# Altium PCB Car_dirver.PcbDoc
Units mil, origin at the board's own origin, x right, y up, seen from the top; angles counter-clockwise.
Board outline 4080 x 5775 mil, 2 copper layers (Top Layer, Bottom Layer); 41 components, 38 nets, 158 pads, 4 vias.
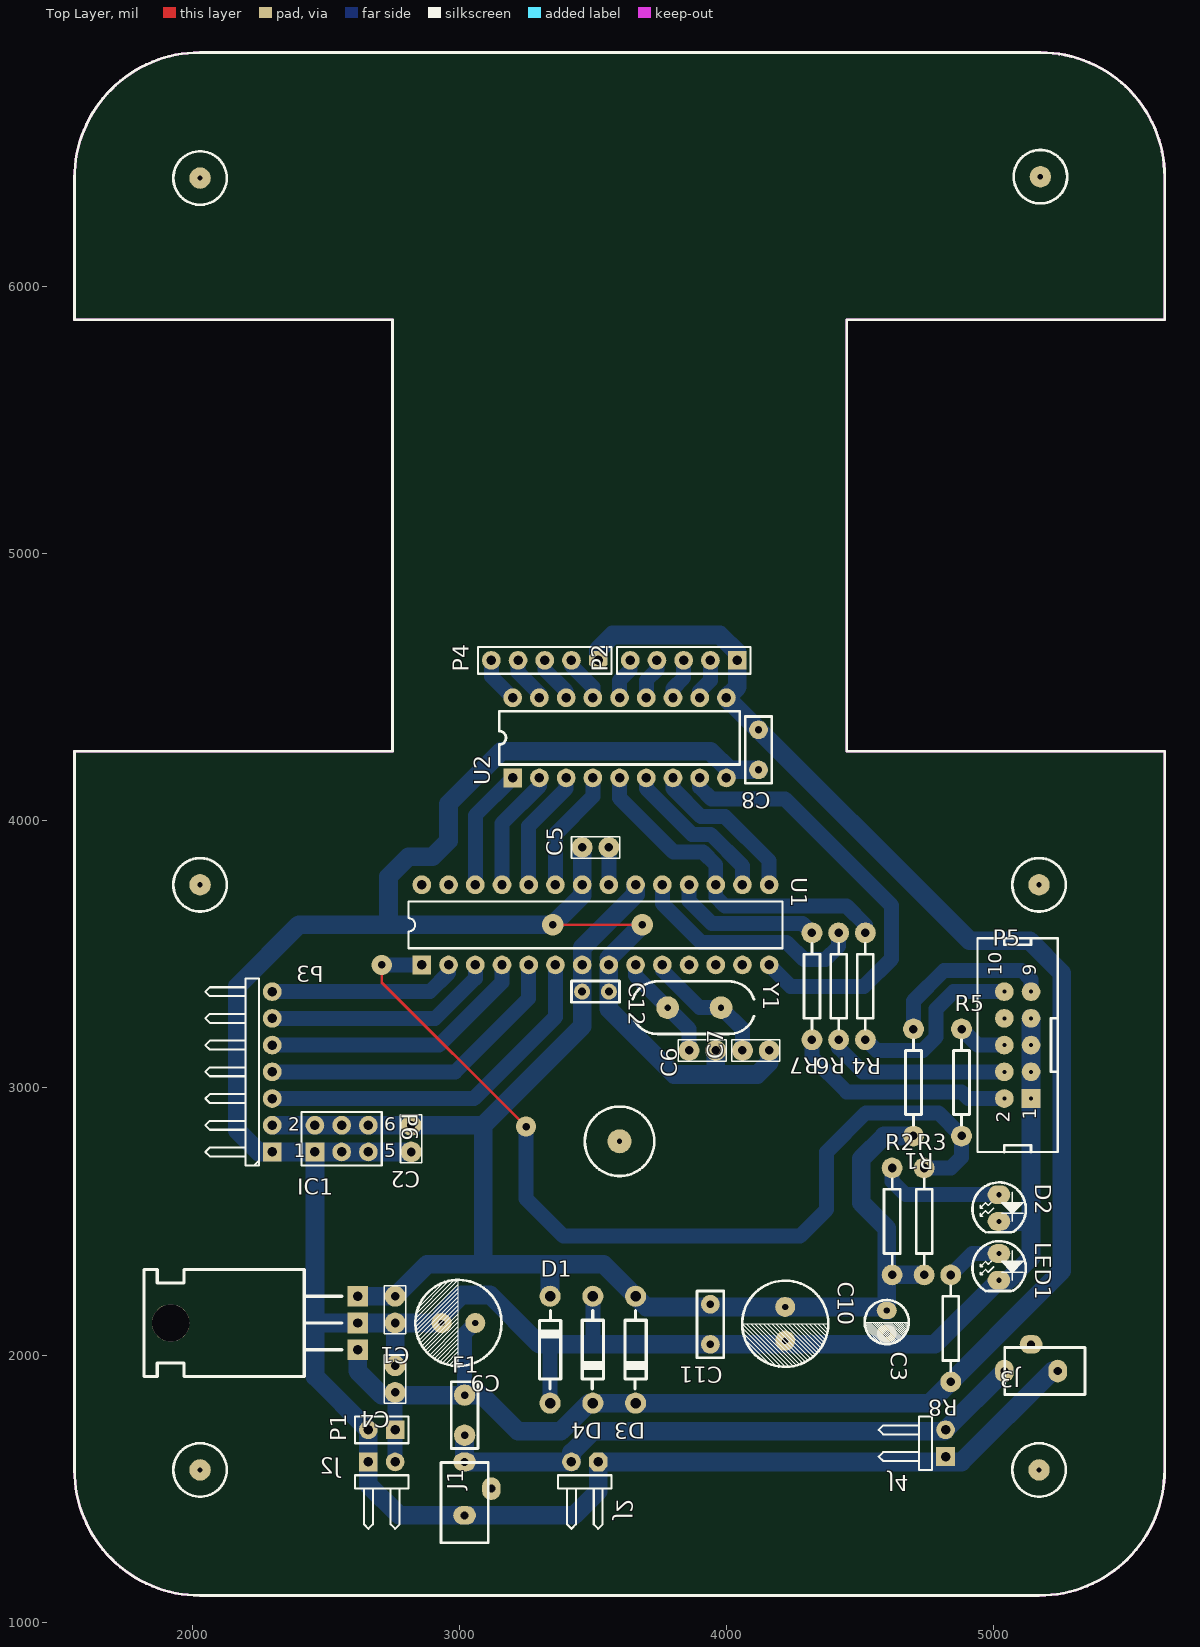
[diagram p0: Top Layer view]
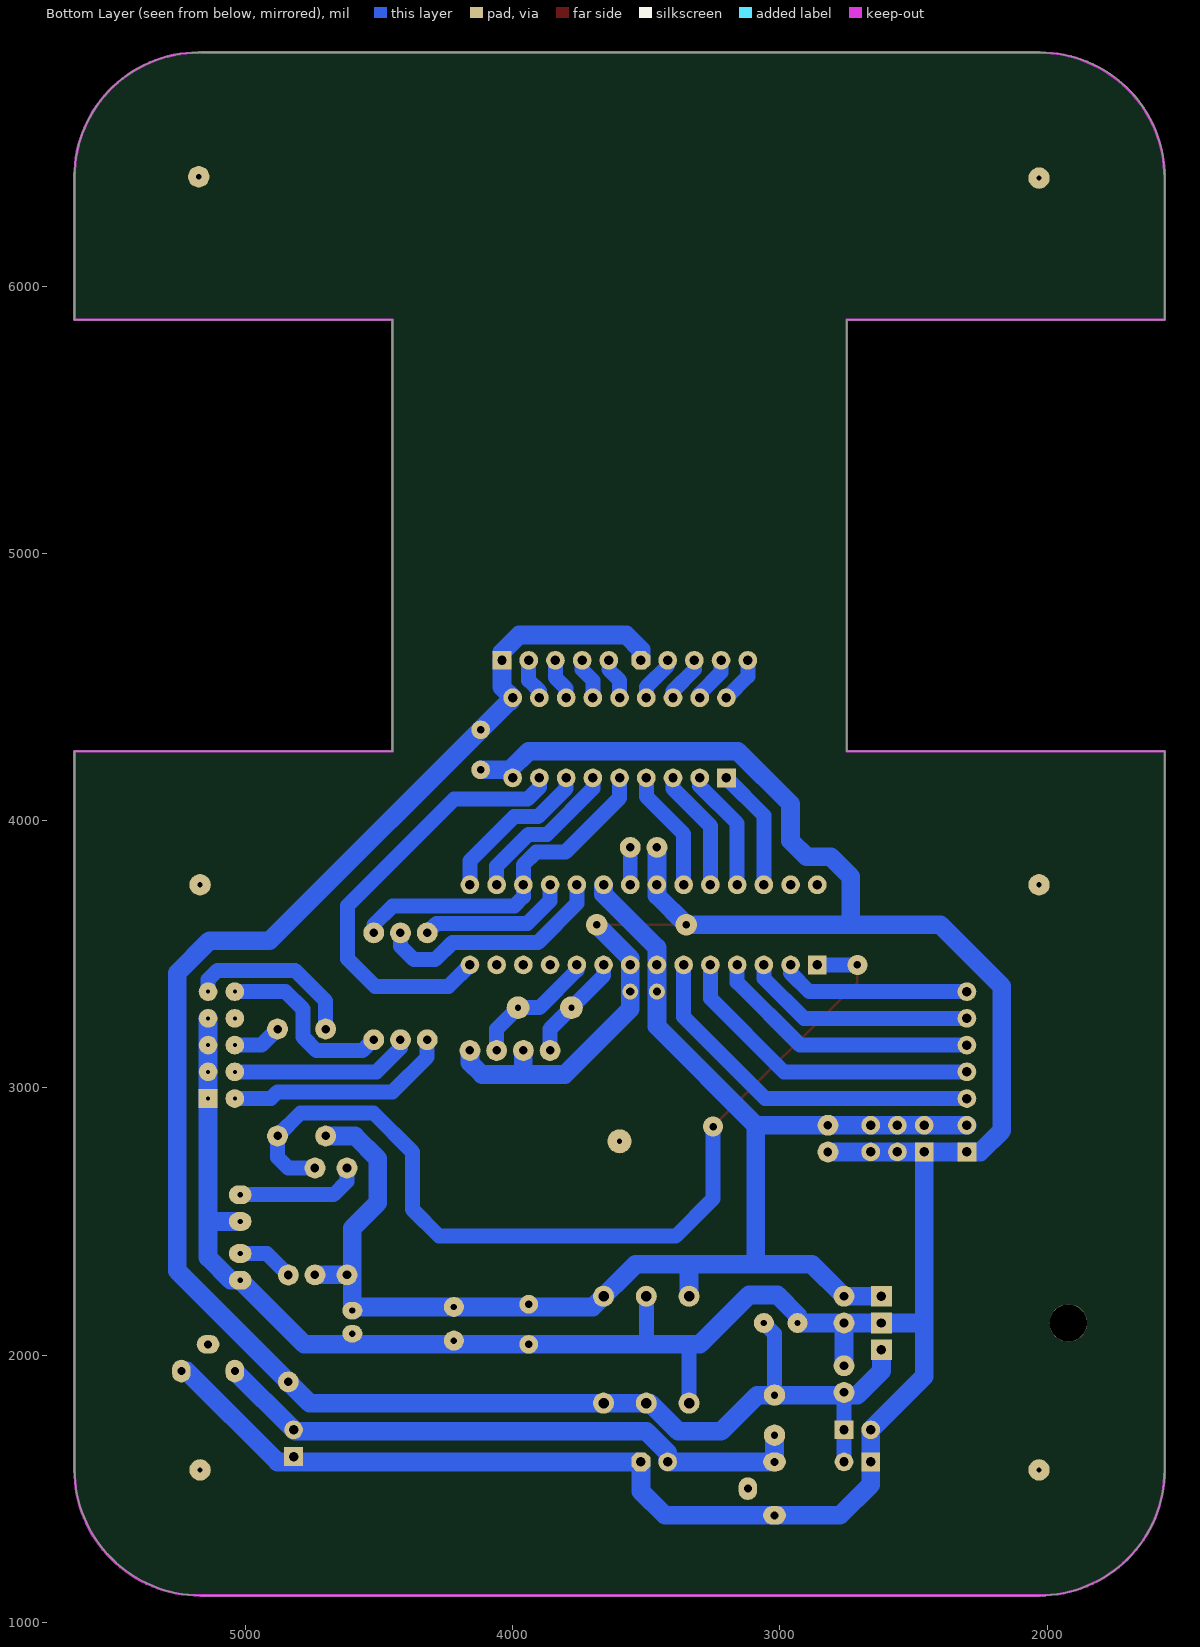
[diagram p1: Bottom Layer view, seen from below]

## Layer stack, top to bottom
Top Layer: signal copper 1.4
Dielectric: dielectric 12.6, FR-4, Dk 4.8
Bottom Layer: signal copper 1.4

## Board outline
2005,1100 5165,1100 ccw(c5165,1575) 5640,1575 5640,4260 4450,4260 4450,5875 5640,5875 5640,6410 ccw(c5175,6410) 5175,6875 2025,6875 ccw(c2025,6410) 1560,6410 1560,5875 2750,5875 2750,4260 1560,4260 1560,1570 ccw(c2030,1570) 2030,1100

## Design rules (kind name [scope] priority, off if disabled: settings)
Clearance [All] p1: gap=10
ComponentClearance [All] p1: gap=10 collisioncheckmode=3 verticalgap=10
PolygonConnect [All] p1: connectstyle=Relief reliefconductorwidth=10 reliefentries=4 polygonreliefangle="90 Angle"
RoutingVias [All] p1: holewidth=28 width=50 viastyle="Through Hole" minholewidth=28 minwidth=50 maxholewidth=28 maxwidth=50
SolderMaskExpansion [All] p1: expansion=4
TestPointUsage [All] p1: valid=0 allowmultiple=FALSE
Testpoint [All] p1: side=15 testpointundercomponent=TRUE minsize=40 maxsize=100 preferedsize=60 minholesize=0 maxholesize=40 preferedholesize=32 testpointgrid=1 style=1023 order=0-112345678
Width [All] p1: maxlimit=85 minlimit=10 preferedwidth=10 toplayer_maxwidth=10 bottomlayer_prefwidth=56 minimp=50.000000 maximp=50.000000 favimp=50.000000
17 further rules are at their usual default settings.

## Classes and differential pairs
component class Car_Driver: C1 C2 C3 C4 C5 C6 C7 C8 C9 C10 C11 C12 D1 D2 D3 D4 F1 IC1 J1 J2 LED1 P1 P2 P3 P4 P5 P6 R1 R2 R3 R4 R5 R6 R7 R8 U1 U2 Y1

## Components (designator, comment, footprint, x,y, rotation, side; value= is the part's Value field where it differs from the comment)
C1 "104" CB1 2760,2220 r270 top
C2 "102" CB1 2820,2860 r270 top
C3 "10uf" 10U16 4600,2166.61 r270 top
C4 "104" CB1 2760,1960 r270 top
C5 "104" CB1 3560,3900 r180 top
C6 "20" CB1 3960,3140 r180 top
C7 "20" CB1 4160,3140 r180 top
C8 "104" cap_104 4120,4340 r270 top
C9 "1000uf" 470U25 3060,2120 r180 top
C10 "100uf" 470U25 4220,2180 r270 top
C11 "104" cap_104 3940,2190 r270 top
C12 "102" C0.1/0.2 3460,3360 r0 top
D1 "5V1" DIODE 3340,1820 r90 top
D2 "LED" LED_5 5020,2600 r270 top
D3 "Diode 1N4001" diode 3660,2220 r270 top
D4 "IN4148" DIODE 3500,2220 r270 top
F1 "FUSE" CAP_104 3020,1700 r90 top
IC1 "7805_1" to-220 2620,2020 r90 top
J1 "PWR2.5" DC3 3020,1400 r180 top
J2 "2PIN-1" HDR1X2H#1 2660,1600 r0 top
J2 "2PIN-1" HDR1X2H#2 3520,1600 r180 top
J3 "PWR2.5" DC3 5240,1940 r270 top (schematic designator J1)
J4 "2PIN-1" HDR1X2H#1 4820,1620 r90 top (schematic designator J2)
LED1 "*" LED_5 5020,2380 r270 top
P1 "Header 2" HDR1X2 2760,1720 r180 top
P2 "Header 5" HDR1X5#1 4040,4600 r180 top
P3 "Header 7" HDR1X7H 2300,2760 r90 top
P4 "Header 5" HDR1X5#2 3520,4600 r180 top
P5 "AVRISP" ISP 5140,2960 r90 top
P6 "Header 3X2" HDR2X3 2460,2760 r0 top
R1 "20" AXIAL0.4 4700,3220 r270 top
R2 "1k" AXIAL0.4 4620,2300 r90 top
R3 "100" AXIAL0.4 4740,2300 r90 top
R4 "100" AXIAL0.4 4520,3580 r270 top
R5 "100" AXIAL0.4 4880,2820 r90 top
R6 "100" AXIAL0.4 4420,3580 r270 top
R7 "100" AXIAL0.4 4320,3580 r270 top
R8 "1k" AXIAL0.4 4839.6,2299.6 r270 top
U1 "ATMEGA8_DIP28" 28P3 3510,3610 r0 top
U2 "ULN2803AG" DIP18 3200,4160 r90 top
Y1 "7.372" XTAL_US 3780,3300 r0 top

## Footprints (in the part's own frame and the unit in brackets; to place one, negate y for a bottom-side part, rotate by r counter-clockwise, add the part's x,y. Pads: shape width x height; smd on the part's side, far side on the other; paste and mask are expansions set on the pad)
10U16 [mm]
  oval 1.651x1.905 hole 0.6: 1(0,0) 2(2.2,0)
  silkscreen extent -1,-2.1 3.2,2.1
28P3 [mil] "DIP; 28 Leads; Row Spacing 7.62 mm; Pitch 2.54 mm"
  rect 70x70 hole 35.43 unplated: 1(-650,-150)
  round 70 hole 35.43 unplated: 2(-550,-150) 3(-450,-150) 4(-350,-150) 5(-250,-150) 6(-150,-150) 7(-50,-150) 8(50,-150) 9(150,-150) 10(250,-150) 11(350,-150) 12(450,-150) 13(550,-150) 14(650,-150) 15(650,150) 16(550,150) 17(450,150) 18(350,150) 19(250,150) 20(150,150) 21(50,150) 22(-50,150) 23(-150,150) 24(-250,150) 25(-350,150) 26(-450,150) 27(-550,150) 28(-650,150)
  silkscreen extent -700,-88 700,88
470U25 [mm]
  round 1.905 hole 0.6: 1(0,0) 2(3.2,0)
  silkscreen extent -2.5,-4.1 5.7,4.1
AXIAL0.4 [mil]
  round 78 hole 32 paste+0 mask+4: 1(0,0) 2(400,0)
  silkscreen extent 40,-30 360,30
C0.1/0.2 [mil]
  round 60 hole 30: 1(0,0) 2(100,0)
  silkscreen extent -40,-40 140,40
cap_104 [mil]
  round 70 hole 27.56: 1(0,0) 2(150,0)
  silkscreen extent -50,-50 200,50
CAP_104 [mil]
  round 80 hole 27.56: 1(0,0) 2(150,0)
  silkscreen extent -50,-50 200,50
CB1 [mil]
  round 78 hole 32 paste+0 mask+4: 1(0,0) 2(100,0)
  silkscreen extent -40,-40 140,40
DC3 [mil]
  oval 85x70 hole 30 unplated: 1(0,-200) 2(0,0)
  oval 70x85 hole 30 unplated: 3(-100,-100)
  silkscreen extent -88,-198 88,102
DIODE [mm]
  round 2 hole 1: 1(0,0) 2(10.16,0)
  silkscreen extent 1.35,-1.02 8.78,1.02
diode [mm]
  round 2 hole 1: 1(0,0) 2(10.16,0)
  silkscreen extent 1.35,-1.02 8.78,1.02
DIP18 [mil]
  rect 70x70 hole 35.43 unplated: 1(0,0)
  round 70 hole 35.43 unplated: 2(0,-100) 3(0,-200) 4(0,-300) 5(0,-400) 6(0,-500) 7(0,-600) 8(0,-700) 9(0,-800) 10(300,-800) 11(300,-700) 12(300,-600) 13(300,-500) 14(300,-400) 15(300,-300) 16(300,-200) 17(300,-100) 18(300,0)
  silkscreen extent 50,-850 250,50
HDR1X2 [mil] "Connector; Header; 2 Position"
  rect 70x70 hole 35.43 unplated: 1(0,0)
  round 70 hole 35.43 unplated: 2(100,0)
  silkscreen extent -50,-50 150,50
HDR1X2H#1 [mil] "Connector; Header; 2 Position; Right Angle"
  rect 70x70 hole 35.43 unplated: 1(0,0)
  round 70 hole 35.43 unplated: 2(100,0)
  silkscreen extent -50,-250 150,-50
HDR1X2H#2 [mil] "Connector; Header; 2 Position; Right Angle"
  oct 70x70 hole 35.43 unplated: 1(0,0)
  round 70 hole 35.43 unplated: 2(100,0)
  silkscreen extent -50,50 150,250
HDR1X5#1 [mil] "Connector; Header; 5 Position"
  rect 70x70 hole 35.43 unplated: 1(0,0)
  round 70 hole 35.43 unplated: 2(100,0) 3(200,0) 4(300,0) 5(400,0)
  silkscreen extent -50,-50 450,50
HDR1X5#2 [mil] "Connector; Header; 5 Position"
  oct 70x70 hole 35.43 unplated: 1(0,0)
  round 70 hole 35.43 unplated: 2(100,0) 3(200,0) 4(300,0) 5(400,0)
  silkscreen extent -50,-50 450,50
HDR1X7H [mil] "Connector; Header; 7 Position; Right Angle"
  rect 70x70 hole 35.43 unplated: 1(0,0)
  round 70 hole 35.43 unplated: 2(100,0) 3(200,0) 4(300,0) 5(400,0) 6(500,0) 7(600,0)
  silkscreen extent -50,50 650,250
HDR2X3 [mil] "Connector; Header; 3x2 Position"
  rect 70x70 hole 35.43 unplated: 1(0,0)
  round 70 hole 35.43 unplated: 2(0,100) 3(100,0) 4(100,100) 5(200,0) 6(200,100)
  silkscreen extent -50,-50 250,150
ISP [mil]
  rect 70x70 hole 15: 1(0,0)
  round 70 hole 15: 2(0,100) 3(100,0) 4(100,100) 5(200,0) 6(200,100) 7(300,0) 8(300,100) 9(400,0) 10(400,100)
  silkscreen extent -200,-100 600,200
LED_5 [mil]
  oval 70x85 hole 20 unplated: 1(0,0) 2(100,0)
  silkscreen extent -46,-99 140,101
to-220 [mil]
  round 140 hole 140: 0(100,700)
  rect 78x78 hole 35 paste+0 mask+4: 1(0,0) 2(100,0) 3(200,0)
  silkscreen extent -100,60 300,800
XTAL_US [mil]
  round 85 hole 23.62: 1(0,0) 2(200,0)
  silkscreen extent -131,-98 323,98

## Part data
C1 C2 C4 C5 C8 C11 C12: library part E_4
C3 C9 C10: library part E_2
C6 C7: library part CAP, "Capacitor"
D1: library part "D Schottky", "Schottky Diode"
D3: "1 Amp General Purpose Rectifier"
F1: "Fuse"
J1 J3: "Low Voltage Power Supply Connector"
LED1: library part LED_1
P1: "Header, 2-Pin"
P2 P4: "Header, 5-Pin"
P3: "Header, 7-Pin"
P5: library part CON10, "Connector"
P6: "Header, 3-Pin, Dual row"
R1 R2 R3 R4 R5 R6 R7: library part RES1
R8: library part R1
U1: "Atmel Microcontroller - Library created by carel..  <www.mpfreezone.com>"
U2: library part TD62081
Y1: library part CRYSTAL, "Crystal"

## Free pads (board coordinates)
  round 80 hole 20: 0(2030,1570) 0(2030,3760) 0(2030,6405) 0(5170,1570) 0(5170,3760) 0(5175,6410)
  round 90 hole 20: 0(3600,2800)

## Via types
v1: diameter 75, hole 28, Top Layer to Bottom Layer, 2 vias
v2: diameter 80, hole 28, Top Layer to Bottom Layer, 2 vias

## Nets (pads, with @x,y where several pads share a name; then routed paths per layer and width w, separated by ;. In a path a pad name is that pad's centre, name@x,y a point inside that pad or via, vN(x,y) a via of type N, cw(c..) or ccw(c..) an arc to the next point about the centre after c; other vN are vias at no path point)
GND: C1.2 C2.2 C3.2 C4.1 C5.2 C6.1 C7.1 C8.2 C9.2 C10.2 C11.2 C12.2 D1.1 D2.2 D4.1 IC1.2 J1.2 J2.1 J3.2 J4.1 LED1.2 P1.2 P3.1 P5.1 P5.3 P5.5 P5.7 P6.1 P6.3 P6.5 U1.8 U1.22 U2.9 | length 15200
  Top Layer w10: v2(3350,3610) v2(3685,3610)
  Bottom Layer w56: D1.1 3340,2035 3345,2040 ; 3500,2040 D4.1 ; U2.9 4030,4190 ; 4600,2040 C3.2 ; D2.2@5025,2505 5140,2505
  Bottom Layer w70: 2460,2120 C9.2 2934.02,2149.02 3010,2225 3115,2225 3300,2040 4780,2040 LED1.2 5055,2280 5140,2365 5140,2500 D2.2 ; P6.1 2460,1920 P1.2 2660,1515 2775,1400 3430,1400 3520,1490 3520,1600 4880,1600 5220,1940 J3.2 ; 2735,3610 2735,3790 2810,3865 2900,3865 2960,3925 2960,4062.7 3157.3,4260 3940,4260 4010,4190 C8.2 ; C4.1 C1.2 ; C2.2 2250,2760 2170,2840 2170,3380 2400,3610 v2(3350,3610) 3460,3720 C5.2 ; U1.8 3560,3295 3805,3050 4115,3050 4160,3095 C7.1 ; U1.8@3560,3485 v2(3685,3610) ; 3960,3050 C6.1 ; 5140,2505 P5.7
ISP_MISO: R7.1 U1.18 | length 569.7
  Bottom Layer w56: U1.18 3860,3700 3945,3615 4285,3615 R7.1
ISP_MOSI: R4.1 U1.17 U2.5 | length 1292
  Bottom Layer w56: U2.5 3600,4085 3802,3883 3912,3883 3960,3835 3960,3715 3994,3681 4449,3681 4520,3610 R4.1
ISP_RST: R3.2 R5.1 U1.1 | length 3526.2
  Top Layer w10: v1(2710,3460) 2710,3395 v1(3250,2855)
  Bottom Layer w56: v1(2710,3460) U1.1 ; v1(3250,2855) 3250,2585 3390,2445 4275,2445 4375,2545 4375,2760 4521.56,2906.56 4793.44,2906.56 R5.1 4880,2740 4840,2700 R3.2
ISP_SCK: R6.1 U1.19 | length 887.7
  Bottom Layer w56: U1.19 3760,3690 3905.59,3544.41 4225.59,3544.41 4290,3480 4370,3480 4420,3530 R6.1
MISO: P5.2 R7.2 | length 849.2
  Bottom Layer w56: R7.2 4320,3115 4450,2985 4880,2985 4905,2960 P5.2
MOSI: P5.10 R4.2 | length 689.2
  Bottom Layer w56: R4.2 4522.5,3180 4562.5,3140 4735,3140 4785,3190 4785,3295 4850,3360 P5.10
NetC5_1: C5.1 U1.21 | length 140
  Bottom Layer w56: U1.21 C5.1
NetC6_2: C6.2 U1.9 Y1.1 | length 402.8
  Bottom Layer w56: U1.9 3660,3420 3860,3220 C6.2
NetC7_2: C7.2 U1.10 Y1.2 | length 491.1
  Bottom Layer w56: U1.10 3760,3440 3900,3300 Y1.2 4060,3220 C7.2
NetD2_1: D2.1 R2.2 | length 470.7
  Bottom Layer w56: R2.2 4620,2650 4670,2600 D2.1
NetLED1_1: LED1.1 R8.1 | length 213.7
  Bottom Layer w56: R8.1 4920,2380 LED1.1
NetP2_2: P2.2 U2.11 | length 163.6
  Bottom Layer w56: U2.11@3895,4465 U2.11 3900,4485 3940,4525 P2.2
NetP2_3: P2.3 U2.12 | length 156.6
  Bottom Layer w56: U2.12 3800,4495 3840,4535 P2.3
NetP2_4: P2.4 U2.13 | length 156.6
  Bottom Layer w56: U2.13 3700,4525 3740,4565 P2.4
NetP2_5: P2.5 U2.14 | length 156.6
  Bottom Layer w56: U2.14 3600,4525 3640,4565 P2.5
NetP3_3: P3.3 U1.6 | length 1381.3
  Bottom Layer w56: P3.3 3055,2960 3360,3265 U1.6
NetP3_4: P3.4 U1.5 | length 1198.9
  Bottom Layer w56: P3.4 2985,3060 3260,3335 U1.5
NetP3_5: P3.5 U1.4 | length 1022.3
  Bottom Layer w56: P3.5 2925,3160 3160,3395 U1.4
NetP3_6: P3.6 U1.3 | length 872.1
  Bottom Layer w56: P3.6 2910,3260 3060,3410 U1.3
NetP3_7: P3.7 U1.2 | length 719
  Bottom Layer w56: P3.7 2890,3360 2960,3430 U1.2
NetP4_2: P4.2 U2.15 | length 173.1
  Bottom Layer w56: P4.2 3420,4580 3500,4500 U2.15
NetP4_3: P4.3 U2.16 | length 173.1
  Bottom Layer w56: P4.3 3320,4565 3400,4485 U2.16
NetP4_4: P4.4 U2.17 | length 173.1
  Bottom Layer w56: P4.4 3220,4555 3300,4475 U2.17
NetP4_5: P4.5 U2.18 | length 173.1
  Bottom Layer w56: P4.5 3120,4540 U2.18
NetU1_23: U1.23 U2.4 | length 458
  Bottom Layer w56: U1.23 3360,3950 3500,4090 U2.4
NetU1_24: U1.24 U2.3 | length 458
  Bottom Layer w56: U1.24 3260,3980 3400,4120 U2.3
NetU1_25: U1.25 U2.2 | length 458
  Bottom Layer w56: U1.25 3160,3990 3300,4130 U2.2
NetU1_26: U1.26 U2.1 | length 458
  Bottom Layer w56: U1.26 3060,4020 U2.1
PB0: U1.14 U2.8 | length 1668.9
  Bottom Layer w56: U2.8 3900,4125 3944,4081 4219,4081 4617.51,3682.49 4617.51,3482.51 4515,3380 4240,3380 U1.14
PB1: U1.15 U2.7 | length 601.8
  Bottom Layer w56: U2.7 3800,4120 3905,4015 3995,4015 4160,3850 U1.15
PB3: U1.16 U2.6 | length 590.1
  Bottom Layer w56: U2.6 3700,4120 3871,3949 3941,3949 4060,3830 U1.16
RST: P5.6 R5.2 | length 184.9
  Bottom Layer w56: R5.2 4940,3160 P5.6
SCK: P5.4 R6.2 | length 687.3
  Bottom Layer w56: R6.2 4420,3150 4510,3060 P5.4
V_ISP: P5.9 R1.1 | length 632.1
  Bottom Layer w56: R1.1@4700,3240 4700,3325 4815,3440 5105,3440 5140,3405 P5.9
V_S: F1.1 J1.1 J2.2@3420,1600 J3.1 J4.2 | length 2281.3
  Bottom Layer w70: F1.1 J1.1 3420,1600 3420,1635 3500,1715 4815,1715 J4.2 J3.1
VCC: C1.1 C2.1 C3.1 C10.1 C11.1 C12.1 D1.2 D3.1 IC1.3 P3.2 P6.2 P6.4 P6.6 R1.2 R2.1 R3.1 U1.7 U1.20 | length 5647.6
  Bottom Layer w56: 3335,2340 3340,2335
  Bottom Layer w70: P3.2 3090,2860 ; IC1.3 C1.1 2880,2340 3540,2340 3700,2180 4586.61,2180 C3.1 4600,2475 4505,2570 4505,2735 4590,2820 R1.2 ; 3090,2340 3090,2860 ; D1.2 3340,2335 ; U1.20 3660,3725 3460,3525 3460,3230 3090,2860 ; R2.1@4600,2300 R3.1
VIN: C4.2 C8.1 C9.1 D3.2 D4.2 F1.2 IC1.1 J2.2@2760,1600 P1.1 P2.1 P4.1 R8.2 U2.10 | length 7140
  Bottom Layer w56: J2.2@2760,1600 C4.2@2760,1850 ; F1.2 3020,2080 C9.1
  Bottom Layer w70: IC1.1 2620,1940 2710,1850 3085,1850 3220,1715 3380,1715 3485,1820 4760,1820 5255,2315 5255,3430 5135,3550 4910,3550 4015,4445 U2.10@4010,4445 ; P4.1 3520,4640 3575,4695 3975,4695 P2.1@4040,4630 ; U2.10 4040,4500 P2.1
pads on no net: IC1.0 J1.3 J3.3 P5.8 U1.11 U1.12 U1.13 U1.27 U1.28

## Keep-outs
Keep-Out Layer:
  lines w10: 5165,6875 2030,6875 ccw(c2030,6405) 1560,6405 1560,5875 2750,5875 2750,5745 2750,4260 1560,4260 1560,1570 ccw(c2030,1570) 2030,1100 5170,1100 ccw(c5170,1570) 5640,1570 5640,4260 5375,4260 4450,4260 4450,5875 4975,5875 5640,5875 5640,6410 ; 5640,6420 5640,6425 ; 5640,6410 ccw(c5175,6410) 5175,6875 cw(c5175,6410) 5640,6410

## Silkscreen, mask and mechanical layers (free items; w line width, h text height)
Top Overlay:
  circle w10: c3600,2800 r130
  circle w10: c2030,1570 r100
  circle w10: c5170,1570 r100
  circle w10: c5175,6410 r100
  circle w10: c2030,6405 r100
  circle w10: c5170,3760 r100
  circle w10: c2030,3760 r100
  lines w10: 5605,5875 5640,5875 ; 5640,5875 4840,5875 4450,5875 4450,4260 5640,4260 5640,1570 cw(c5170,1570) 5170,1100 2030,1100 cw(c2030,1570) 1560,1570 1560,4260 2750,4260 2750,4375 2750,5875 2460,5875 1560,5875 1560,6405 cw(c2030,6405) 2030,6875 5175,6875 cw(c5175,6410) 5640,6410 5640,5875

## Text inside footprints (layer, text, board x,y; h text height)
P5: Top Overlay "2" at 5060,2870 h50 r90; Top Overlay "1" at 5160,2880 h50 r90; Top Overlay "9" at 5160,3420 h50 r90; Top Overlay "10" at 5030,3420 h50 r90
P6: Top Overlay "1" at 2380,2740 h50; Top Overlay "2" at 2360,2840 h50; Top Overlay "5" at 2720,2740 h50; Top Overlay "6" at 2720,2840 h50